# Altium PCB DC-DC Converter.PcbDoc (part 1 of 3)
Units mil, origin at the board's own origin, x right, y up, seen from the top; angles counter-clockwise.
Board outline 6692.91 x 3543.31 mil, 4 copper layers (Top Layer, GND, Power, Bottom Layer), stack 23.756 mil thick; 100 components, 76 nets, 345 pads, 803 vias.
Unrouted connection lines stored in the file: 1.
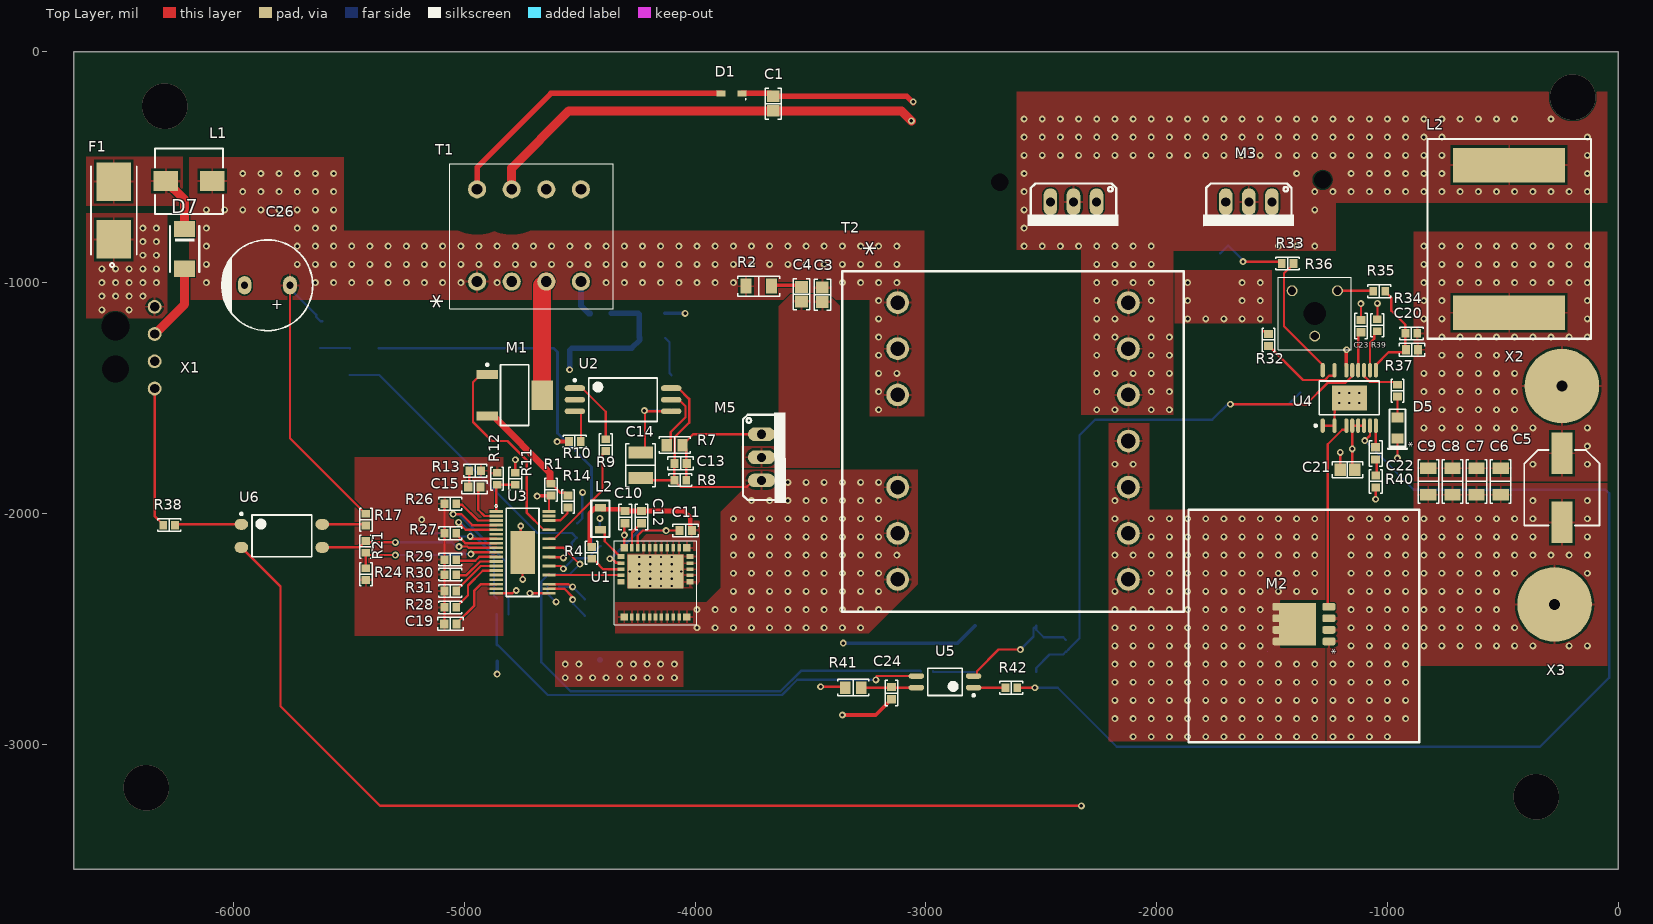
[diagram p0: Top Layer view]
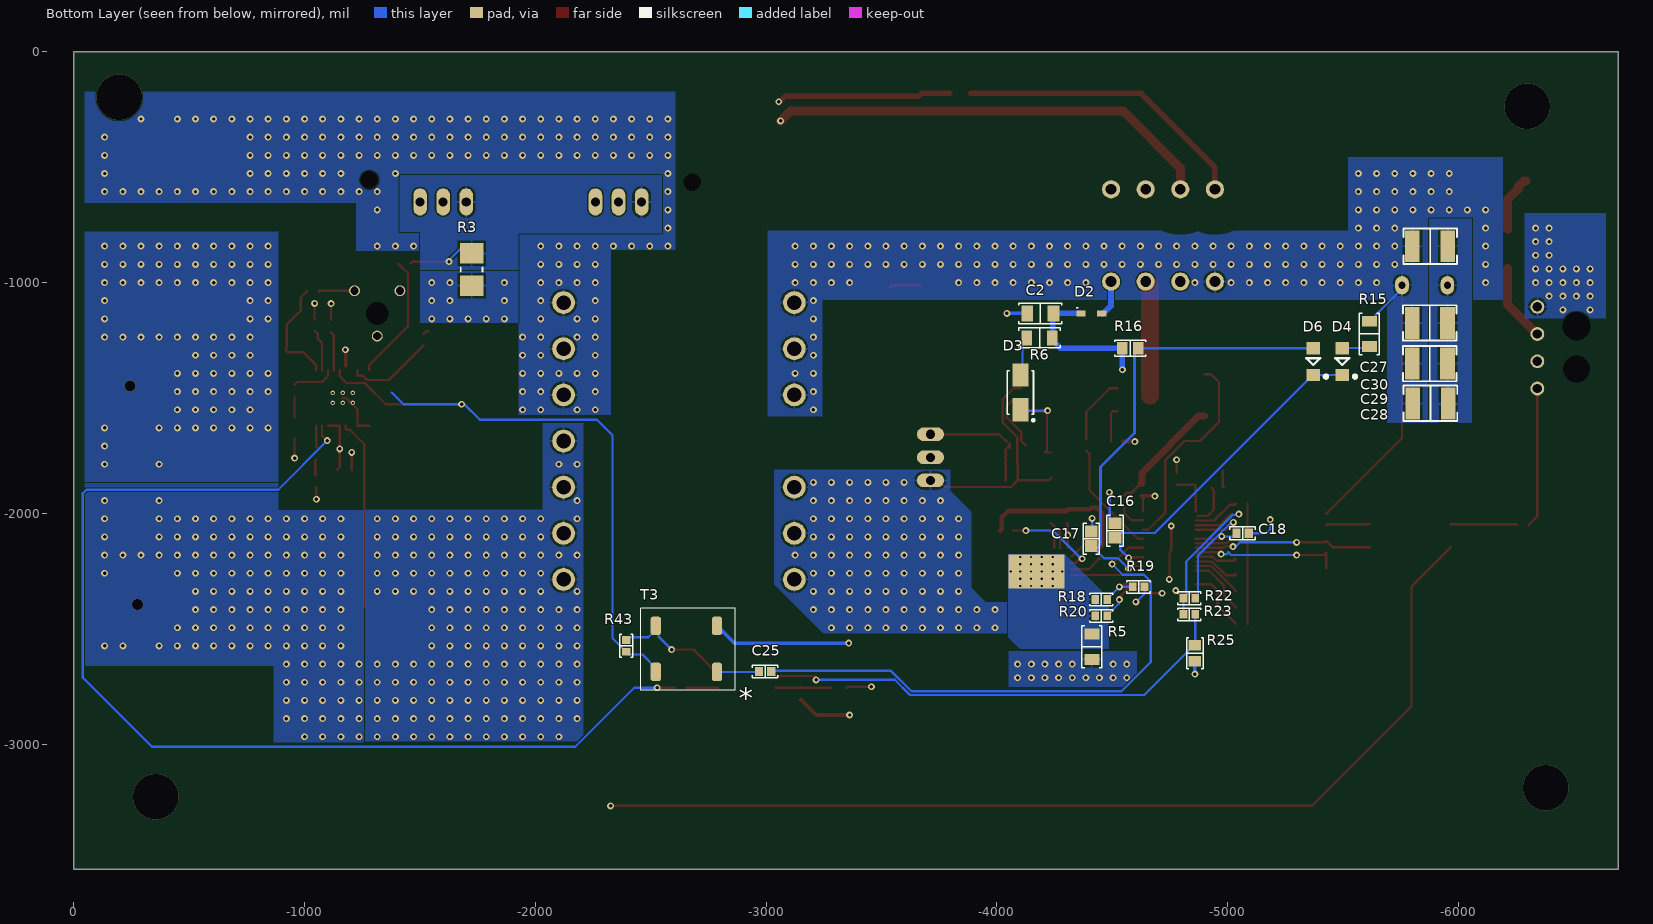
[diagram p1: Bottom Layer view, seen from below]
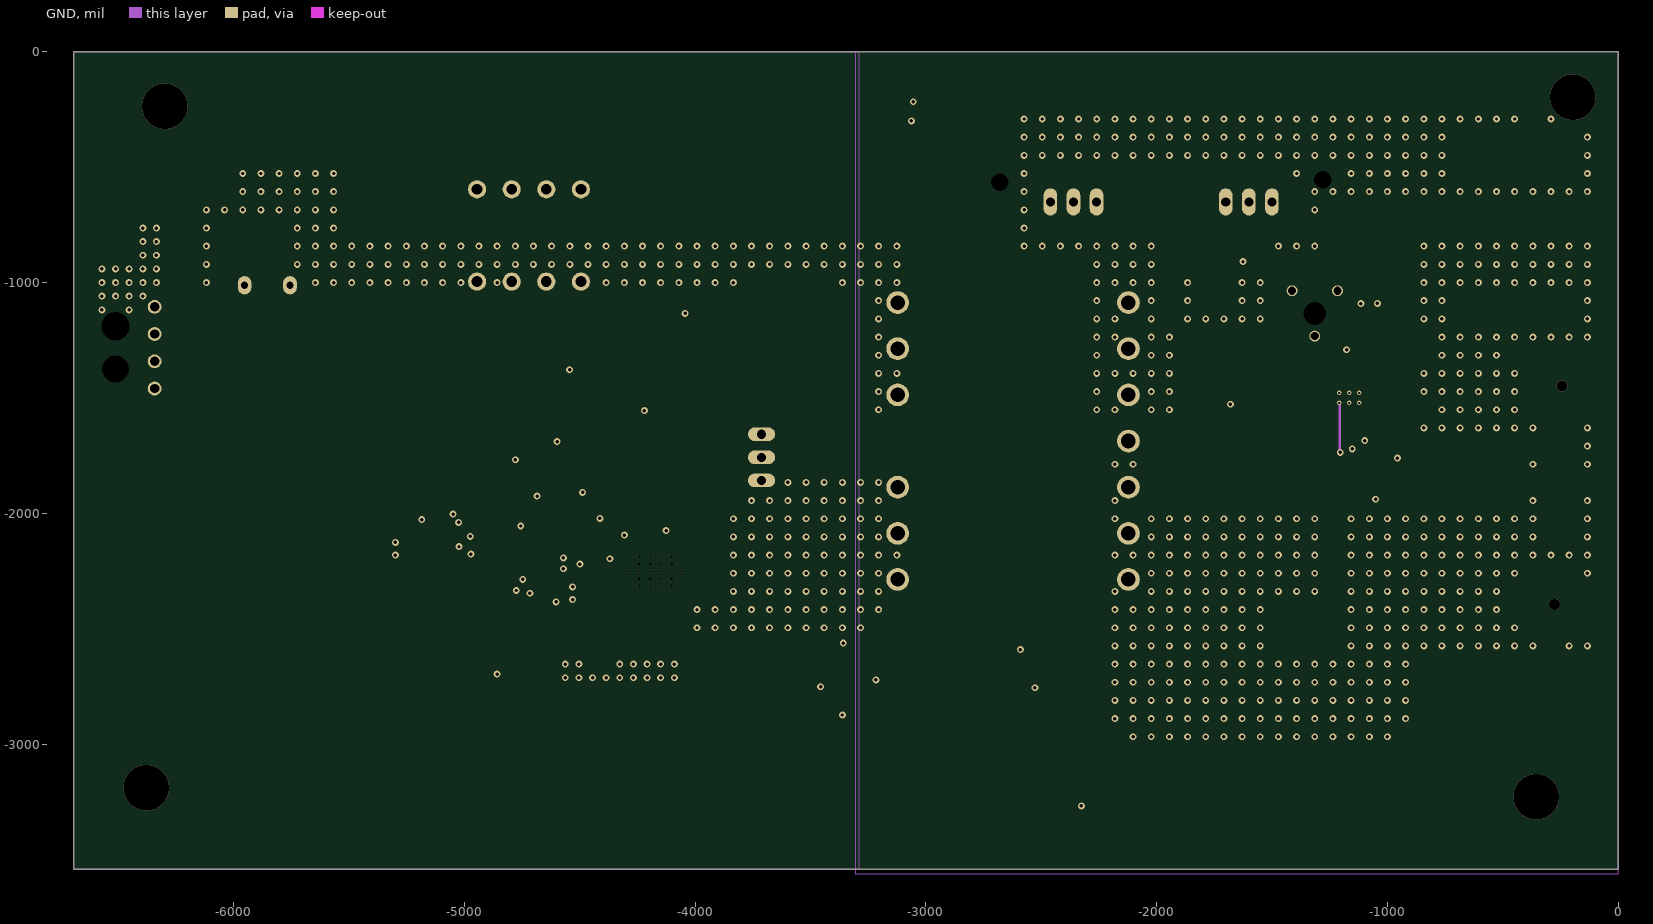
[diagram p2: GND]
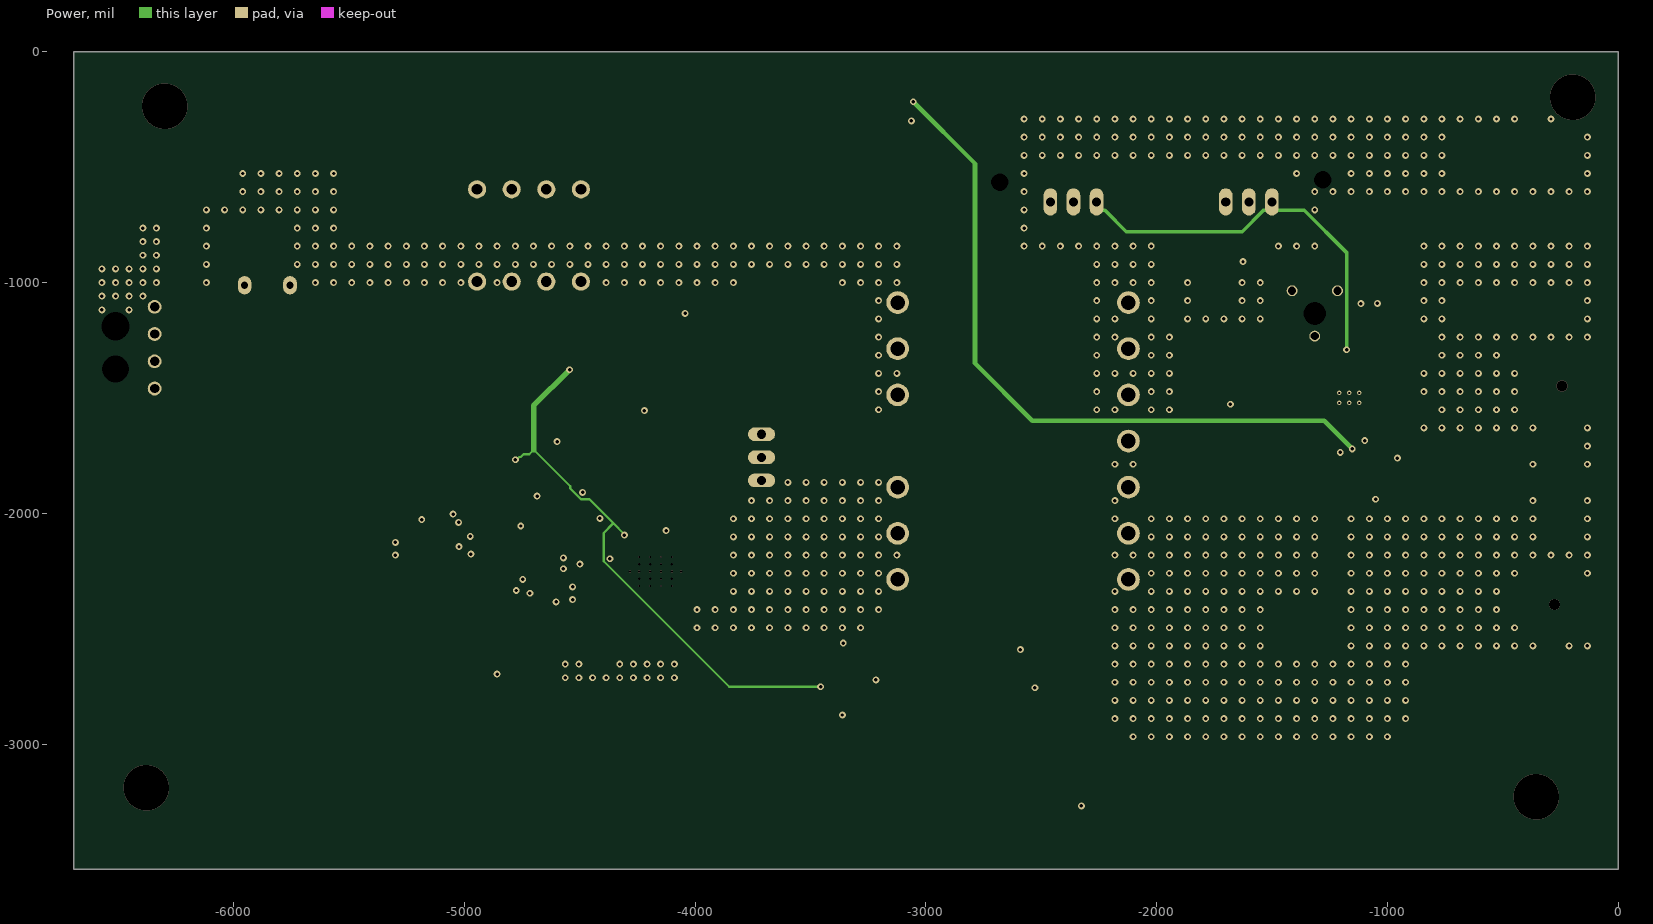
[diagram p3: Power]

## Layer stack, top to bottom
Top Solder: solder mask 0.4, Solder Resist, Dk 3.5
Top Layer: signal copper 1.4
Dielectric 2: prepreg 2.8, PP-006, Dk 4.1
GND: signal copper 1.3779
Dielectric 1: dielectric 12.6, FR-4, Dk 4.8
Power: signal copper 1.3779
Dielectric 3: prepreg 2.8, PP-006, Dk 4.1
Bottom Layer: signal copper 1.4
Bottom Solder: solder mask 0.4, Solder Resist, Dk 3.5

## Board outline
-6692.91,-3543.31 0,-3543.31 0,0 -6692.91,0

## Design rules (kind name [scope] priority, off if disabled: settings)
Clearance Clearance_1 [InNetClass('HV') vs InNetClass('LV')] p1: gap=157.48 ignorepadtopadclearanceinfootprint=FALSE
Clearance [InNetClass('All Nets')] p2: gap=6 ignorepadtopadclearanceinfootprint=FALSE
FabricationTestPointUsage TestPointUsage [All] p1: valid=0 allowmultiple=FALSE
FabricationTestpoint Testpoint [All] p1: side=3 testpointundercomponent=TRUE minsize=40 maxsize=100 preferedsize=60 minholesize=20 maxholesize=40 preferedholesize=32 testpointgrid=1 allowsidetop=TRUE allowsidebottom=TRUE usegrid=TRUE gridtolerance=0.01
Height [All] p1: minheight=0 maxheight=1968.5 prefheight=500
HoleSize [All] p1: absolutevalues=TRUE maxlimit=247 minlimit=10 maxpercent=80.000 minpercent=20.000
PasteMaskExpansion PasteMaskExpansion_1 [InComponent('P1')] p1: expansion=-150
PasteMaskExpansion [All] p2: expansion=0
PlaneClearance [All] p1: clearance=10
PlaneConnect [All] p1: planeconnectstyle=Relief reliefexpansion=15 reliefentries=4 reliefconductorwidth=10 reliefairgap=10
PolygonConnect PolygonConnect_4 [All vs IsNamedPolygon('HV+_L04_P106') Or  IsNamedPolygon('HVGND_L01_P104') Or  IsNamedPolygon('HVGND_L04_P102') Or  IsNamedPolygon('Top Layer-Pri_Drain_SWP') Or  IsNamedPolygon('LVGND_L01_P096') Or  IsNamedPolygon('LVGND_L04_P094') Or  IsNamedPolygon('CCH_DRAIN_CSW_L04_P092') Or  IsNamedPolygon('FWD_DRAIN_FSW_L04_P090') Or  IsNamedPolygon('+14V_OUT_L04_P088') Or  IsNamedPolygon('LVGND_L04_P086') Or  IsNamedPolygon('HV_IN_L04_P084') Or  IsNamedPolygon('HV_IN_L01_P082') Or  IsNamedPolygon('LVGND_L04_P080') Or  IsNamedPolygon('FWD_DRAIN_FSW_L01_P078') Or  IsNamedPolygon('LVGND_L01_P076') Or  IsNamedPolygon('AGND_L01_P074') Or  IsNamedPolygon('CCH_I_SENSE_L04_P072') Or  IsNamedPolygon('CCH_DRAIN_CSW_L01_P070') Or  IsNamedPolygon('LVGND_L01_P068') Or  IsNamedPolygon('+14V_OUT_L01_P066') Or  IsNamedPolygon('HV_IN_L04_P064') Or  IsNamedPolygon('HVGND_L04_P062') Or  IsNamedPolygon('HV+_L01_P060') Or  IsNamedPolygon('VIN_F_L01_P058') Or  IsNamedPolygon('Bottom Layer-Pri_Current_Sense') Or  IsNamedPolygon('Top Layer-Pri_Current_Sense') Or  IsNamedPolygon('Top Layer-Pri_Drain_SWP') Or  IsNamedPolygon('Top Layer-Clp_Drain') Or  IsNamedPolygon('LVGND') Or  IsNamedPolygon('HVGND')] p1: thpad.connectstyle=Relief thpad.reliefconductorwidth=10 thpad.reliefentries=4 thpad.polygonreliefangle="90 Angle" thpad.airgapwidth=10 smdpad.connectstyle=Relief smdpad.reliefconductorwidth=10 smdpad.reliefentries=4 smdpad.polygonreliefangle="90 Angle" smdpad.airgapwidth=10 via.connectstyle=Direct via.reliefconductorwidth=10 via.reliefentries=4 via.polygonreliefangle="90 Angle" via.airgapwidth=10
PolygonConnect PolygonConnect_3 [All vs IsNamedPolygon('HV+_L04_P106') Or  IsNamedPolygon('HVGND_L01_P104') Or  IsNamedPolygon('HVGND_L04_P102') Or  IsNamedPolygon('Top Layer-Pri_Drain_SWP') Or  IsNamedPolygon('LVGND_L01_P096') Or  IsNamedPolygon('LVGND_L04_P094') Or  IsNamedPolygon('CCH_DRAIN_CSW_L04_P092') Or  IsNamedPolygon('FWD_DRAIN_FSW_L04_P090') Or  IsNamedPolygon('+14V_OUT_L04_P088') Or  IsNamedPolygon('LVGND_L04_P086') Or  IsNamedPolygon('HV_IN_L04_P084') Or  IsNamedPolygon('HV_IN_L01_P082') Or  IsNamedPolygon('LVGND_L04_P080') Or  IsNamedPolygon('FWD_DRAIN_FSW_L01_P078') Or  IsNamedPolygon('LVGND_L01_P076') Or  IsNamedPolygon('AGND_L01_P074') Or  IsNamedPolygon('CCH_I_SENSE_L04_P072') Or  IsNamedPolygon('CCH_DRAIN_CSW_L01_P070') Or  IsNamedPolygon('LVGND_L01_P068') Or  IsNamedPolygon('+14V_OUT_L01_P066') Or  IsNamedPolygon('HV_IN_L04_P064') Or  IsNamedPolygon('HVGND_L04_P062') Or  IsNamedPolygon('HV+_L01_P060') Or  IsNamedPolygon('VIN_F_L01_P058') Or  IsNamedPolygon('Bottom Layer-Pri_Current_Sense') Or  IsNamedPolygon('Top Layer-Pri_Current_Sense') Or  IsNamedPolygon('Top Layer-Pri_Drain_SWP') Or  IsNamedPolygon('Top Layer-Clp_Drain') Or  IsNamedPolygon('LVGND') Or  IsNamedPolygon('HVGND')] p2: thpad.connectstyle=Relief thpad.reliefconductorwidth=10 thpad.reliefentries=4 thpad.polygonreliefangle="90 Angle" thpad.airgapwidth=10 smdpad.connectstyle=Relief smdpad.reliefconductorwidth=10 smdpad.reliefentries=4 smdpad.polygonreliefangle="90 Angle" smdpad.airgapwidth=10 via.connectstyle=Direct via.reliefconductorwidth=10 via.reliefentries=4 via.polygonreliefangle="90 Angle" via.airgapwidth=10
PolygonConnect PolygonConnect_2 [All vs IsNamedPolygon('LVGND_L01_P076')] p3: thpad.connectstyle=Relief thpad.reliefconductorwidth=10 thpad.reliefentries=4 thpad.polygonreliefangle="90 Angle" thpad.airgapwidth=10 smdpad.connectstyle=Direct smdpad.reliefconductorwidth=10 smdpad.reliefentries=4 smdpad.polygonreliefangle="90 Angle" smdpad.airgapwidth=10 via.connectstyle=Relief via.reliefconductorwidth=10 via.reliefentries=4 via.polygonreliefangle="90 Angle" via.airgapwidth=10
PolygonConnect PolygonConnect_1 [All vs IsNamedPolygon('FWD_DRAIN_FSW_L01_P078')] p4: thpad.connectstyle=Relief thpad.reliefconductorwidth=10 thpad.reliefentries=4 thpad.polygonreliefangle="90 Angle" thpad.airgapwidth=10 smdpad.connectstyle=Direct smdpad.reliefconductorwidth=10 smdpad.reliefentries=4 smdpad.polygonreliefangle="90 Angle" smdpad.airgapwidth=10 via.connectstyle=Relief via.reliefconductorwidth=10 via.reliefentries=4 via.polygonreliefangle="90 Angle" via.airgapwidth=10
PolygonConnect PolygonConnect_11 [All vs IsNamedPolygon('Top Layer-Pri_Current_Sense')] p5: connectstyle=Relief reliefconductorwidth=10 reliefentries=4 polygonreliefangle="90 Angle" airgapwidth=10
PolygonConnect [All] p6: connectstyle=Relief reliefconductorwidth=10 reliefentries=4 polygonreliefangle="90 Angle" airgapwidth=10
RoomDefinition "U_Enable SSR" [InComponentClass('U_Enable SSR')] p1: confinementstyle=ConfineIn formatcopy=TRUE lockcomponents=FALSE outline -5547.24,-1965.56 -6464.57,-1965.56 -6464.57,-2308.08 -5547.24,-2308.08
RoutingVias [All] p1: holewidth=15 width=30 viastyle="Through Hole" minholewidth=10 minwidth=20 maxholewidth=15 maxwidth=50
SilkToSilkClearance [All] p1: silktosilkclearance=3
SilkToSolderMaskClearance SilkscreenOverComponentPads [IsPad] p1: minsilkscreentomaskgap=5 clearancetoexposedcopper=TRUE
SolderMaskExpansion [All] p1: expansion=5
UnRoutedNet [All] p1: checkbadconnections=TRUE
Width [All] p1: maxlimit=150 minlimit=5 preferedwidth=10
20 further rules are at their usual default settings.

## Classes and differential pairs
net class LV: 8311_COMP 8311_COMP_MID 8311_CSN 8311_CSP 8311_FB 8311_FB_R 8311_SS 8311_TIMER +12V_HC_LV +14V_OUT Aux_Sec_LV__Dot Cch_Drain_CSW Cch_Drive Cch_I_Sense CPC_CTRL+ Fwd_Drain_FSW Fwd_Drive LVGND NetR36_3 OPTO_OUT P\G\O\O\D\ P\G\O\O\D_R SSR_ENABLE SYNC_OUT
net class HV: +12V_HC_HV AGND Aux_Pri_Dot Aux_Sec_HV_Dot BBSW Cch_Gate Clp_Drain Clp_Gate Comp FB HCOMP HCOMP_C HFB HISENSE HV+ HV_IN HV_IN_R HVGND INTVCC ISENSEP IVSEC NetU3_6 OC OPTO_C Opto_In OVLO PP5V0_L Pri_Current_Sense Pri_Drain_SWP Pri_Gate Q2_D Q2_G RDRV RT SNUB_RC SS1 SS2 Sync_HV_Dot SYNC_IN TAO TAS TBLNK TOS UVLO_Vsec VIN VIN_F VIN_R VNEG W346_A W346_C W346_Charge W346_OUT W346_VCC
component class "U_Enable SSR": R38 U6
component class U_OptoIsolator: C24 R41 R42 U5
component class "U_System Input": C26 C27 C28 C29 C30 D7 F1 L1
component class "U_Sync Transformer": C25 R43 T3
component class U_LT8311-Main: C20 C21 C22 C23 D5 R32 R33 R34 R35 R36 R37 R39 R40 U4
component class U_LT3752-Main: C15 C16 C17 C18 C19 D4 D6 R11 R12 R13 R14 R15 R16 R17 R18 R19 R20 R21 R22 R23 R24 R25 R26 R27 R28 R29 R30 R31 U3
component class "U_Gate Driver": C13 C14 D3 R6 R7 R8 R9 R10 U2
component class "U_Forward Active Supply": C3 C4 C5 C6 C7 C8 C9 C10 C11 C12 L2 M2 M3 M5 R2 R3 R4 R5 T2 U1
component class U_Flyback: C1 C2 D1 D2 M1 R1 T1
component class "DC-DC Converter": X1 X2 X3

## Components (designator, comment, footprint, x,y, rotation, side; value= is the part's Value field where it differs from the comment)
C1 "Capacitor MLCC 4.7uf 25V CAP 0805/2012" "CAP 0805/2012" -3661.42,-224.41 r90 top value=4.7uf
C2 "Capacitor MLCC 22uf 25V CAP 1206/3216" "CAP 1206/3216 - 1.8MM" -4188.98,-1133.86 r180 bottom value=22uf
C3 "Capacitor MLCC 11pf 250V CAP 0805/2012" "CAP 0805/2012" -3448.82,-1053.31 r90 top value=11pf
C4 "Capacitor MLCC 68pf 200V CAP 0805/2012" "CAP 0805/2012" -3539.37,-1051.18 r90 top value=68pf
C5 "Capacitor Aluminum Hybrid Radial 330uf 25V CAP EL 8.3" "CAP ALUM 8.3MM" -244.09,-1889.76 r270 top value=330uf
C6 "Capacitor MLCC 10uf 25V CAP 1206/3216" "CAP 1206/3216 - 1.8MM" -509.34,-1862.2 r90 top value=10uf
C7 "Capacitor MLCC 10uf 25V CAP 1206/3216" "CAP 1206/3216 - 1.8MM" -613.84,-1862.2 r90 top value=10uf
C8 "Capacitor MLCC 10uf 25V CAP 1206/3216" "CAP 1206/3216 - 1.8MM" -718.34,-1862.2 r90 top value=10uf
C9 "Capacitor MLCC 10uf 25V CAP 1206/3216" "CAP 1206/3216 - 1.8MM" -822.83,-1862.2 r90 top value=10uf
C10 "Capacitor MLCC 10uf 16V CAP 0603/1608" "CAP 0603/1608" -4303.32,-2016.73 r270 top value=10uf
C11 "Capacitor MLCC 0.22uf 50V CAP 0603/1608" "CAP 0603/1608" -4041.08,-2074.8 r180 top value=0.22uf
C12 "Capacitor MLCC 2.2uf 25V CAP 0603/1608" "CAP 0603/1608" -4232.28,-2016.73 r90 top value=2.2uf
C13 "Capacitor MLCC 470pf 50V CAP 0603/1608" "CAP 0603/1608" -4062.99,-1783.46 r0 top value=470pf
C14 "Capacitor MLCC 50.047uf 630V CAP 1210/3225" "CAP 1210/3225 - 1.6MM" -4236.22,-1791.34 r90 top value=0.047uf
C15 "Capacitor MLCC 0.22uf 25V CAP 0603/1608" "CAP 0603/1608" -4956.86,-1886.76 r180 top value=0.22uf
C16 "Capacitor MLCC 22uf 25V CAP 0805/2012" "CAP 0805/2012" -4511.81,-2074.8 r270 bottom value=22uf
C17 "Capacitor MLCC 4.7uf 25V CAP 0805/2012" "CAP 0805/2012" -4409.45,-2110.24 r270 bottom value=4.7uf
C18 "Capacitor MLCC 0.47uf 25V CAP 0603/1608" "CAP 0603/1608" -5064.96,-2086.61 r0 bottom value=0.47uf
C19 "Capacitor MLCC 0.10uf 25V CAP 0603/1608" "CAP 0603/1608" -5061.02,-2478.85 r0 top value=0.10uf
C20 "Capacitor MLCC 68pf 25V CAP 0603/1608" "CAP 0603/1608" -893.7,-1291.34 r0 top value=68pf
C21 "Capacitor MLCC 4.7uf 25V CAP 0805/2012" "CAP 0805/2012" -1173.23,-1811.02 r0 top value=4.7uf
C22 "Capacitor MLCC 0.022uf 16V CAP 0603/1608" "CAP 0603/1608" -1051.01,-1739.99 r90 top value=0.022uf
C23 "Capacitor MLCC 0.033uf 16V CAP 0603/1608" "CAP 0603/1608" -1114.99,-1188.54 r90 top value=0.033uf
C24 "Capacitor MLCC 1.0uf 25V CAP 0603/1608" "CAP 0603/1608" -3149.61,-2779.53 r90 top value=1.0uf
C25 "Capacitor MLCC 220pf 25V CAP 0603/1608" "CAP 0603/1608" -2996.06,-2685.04 r0 bottom value=220pf
C26 "Capacitor Electrolytic 10uf 500V CAP D10_31.5" "CAP AL TH D10 L5 H30" -5854.33,-1011.81 r180 top value=10uf
C27 "Capacitor MLCC 0.3uf 630V CAP 1812/4532" "CAP 1812/4532 2.8MM" -5877.95,-842.52 r0 bottom value=0.3uf
C28 "Capacitor MLCC 0.3uf 630V CAP 1812/4532" "CAP 1812/4532 2.8MM" -5879.13,-1523.62 r0 bottom value=0.3uf
C29 "Capacitor MLCC 0.3uf 630V CAP 1812/4532" "CAP 1812/4532 2.8MM" -5876.38,-1351.18 r0 bottom value=0.3uf
C30 "Capacitor MLCC 0.3uf 630V CAP 1812/4532" "CAP 1812/4532 2.8MM" -5876.38,-1174.8 r0 bottom value=0.3uf
D1 "BAT46WJ" SOD323F -3842.52,-180.31 r180 top value=Vf=0.3@20mA
D2 "BAT46WJ" SOD323F -4409.45,-1133.86 r180 bottom value=Vf=0.3@20mA
D3 "" SMA -4102.36,-1476.38 r270 bottom value=1A
D4 "" SOD123F -5497.17,-1342.52 r270 bottom value=Vf-1.25V,Vr-100V
D5 "" 0805_LED -956.69,-1629.92 r270 top value=Red
D6 "" SOD123F -5371.18,-1342.52 r270 bottom value=Vf-1.25V,Vr-100V
D7 "SD560BTR" "DO214AA_ SD560BTR" -6212.6,-854.33 r270 top value="1.2V @ 5A"
F1 "Fuse" 04853,15DR -6519.29,-687.8 r90 top value=3.15A
L1 "" 744311470 -6193.31,-560.63 r0 top value=4.7uH
L2 "" IHLP-6767GZ -472.44,-811.02 r270 top value=1.5uH
L2 "" 74404020100 -4410.43,-2023.62 r0 top value=10uH
M1 "AUX Transistor" PG-SOT223 -4782.37,-1488.19 r0 top value=N_Channel
M2 "Forward Mosfet" "SOP Advance" -1362.2,-2480.32 r90 top value=N_Channel
M3 "Catch Mosfet x2" TO-220ABx2 -2360.8,-764.95 r180 top value="N_Channel x2"
M5 "Clamp Transistor" IPP60R190P6 -3712.6,-1757.48 r270 top locked value=N_Channel
R1 "RES 0.0025 OHM 1% 1/4W 0603" "RES 0603/1608" -4625,-1897.35 r90 top value=0.0025
R2 "RES 560 OHM 1% 1W 1206" "RES 1206/3216" -3724.41,-1015.75 r180 top value=560
R3 "RES 0.001 OHM 1% 1.5W 2010" "RES 2010/5025" -1724.41,-943.5 r90 bottom value=1mOhm
R4 "Resistor 39k 0603 1/10W 1%" "RES 0603/1608" -4448.82,-2171.51 r270 top value=39k
R5 "RES 0.008 OHM 1% 1W 1206" "RES 1206/3216" -4411.58,-2578.74 r90 bottom value=8mOhm
R6 "RES 1.3 OHM 1% 1/4W 1206" "RES 1206/3216" -4185.04,-1240.16 r180 bottom value=1.3
R7 "Resistor 4.7 0805 1/4W 1%" "RES 0805/2012" -4089.4,-1704.56 r0 top value=4.7
R8 "Resistor 10k 0603 1/10W 1%" "RES 0603/1608" -4064.55,-1856.3 r0 top value=10k
R9 "Resistor 220 0603 1/10W 5%" "RES 0603/1608" -4387.8,-1704.72 r90 top value=220
R10 "Resistor 150 0603 1/10W 5%" "RES 0603/1608" -4521.38,-1688.98 r0 top value=150
R11 "Resistor 10k 0603 1/10W 1%" "RES 0603/1608" -4779.53,-1850.39 r270 top value=10k
R12 "Resistor 806 0603 1/10W 1%" "RES 0603/1608" -4858.27,-1850.39 r270 top value=806
R13 "Resistor 2.8k 0603 1/10W 1%" "RES 0603/1608" -4953.74,-1815.73 r0 top value=2.8k
R14 "Resistor 499 0603 1/10W 1%" "RES 0603/1608" -4551.18,-1948.82 r90 top value=499
R15 "Resistor 715k 1206 1/4W 1%" "RES 1206/3216" -5614.96,-1222.83 r90 bottom value=715k
R16 "Resistor 10 0805 1/4W 10%" "RES 0805/2012" -4578.74,-1284.45 r180 bottom value=10
R17 "Resistor 1.0M 0603 1/10W 1%" "RES 0603/1608" -5427.17,-2027.48 r270 top value=1.0M
R18 "Resistor 20k 0603 1/10W 1%" "RES 0603/1608" -4452.76,-2373.68 r0 bottom value=20k
R19 "Resistor 20k 0603 1/10W 1%" "RES 0603/1608" -4614.17,-2318.9 r0 bottom value=20k
R20 "Resistor 1.5k 0603 1/10W 1%" "RES 0603/1608" -4452.76,-2444.71 r0 bottom value=1.5k
R21 "Resistor 36.5k 0603 1/10W 1%" "RES 0603/1608" -5427.17,-2145.59 r90 top value=36.5k
R22 "Resistor 100k 0603 1/10W 1%" "RES 0603/1608" -4834.65,-2368.61 r0 bottom value=100k
R23 "Resistor 100k 0603 1/10W 1%" "RES 0603/1608" -4834.65,-2437.99 r180 bottom value=100k
R24 "Resistor 3.0k 0603 1/10W 1%" "RES 0603/1608" -5427.17,-2263.7 r90 top value=3.0k
R25 "Resistor 1.0k 0805 1/4W 5%" "RES 0805/2012" -4858.27,-2606.3 r90 bottom value=1.0k
R26 "Resistor 24.9k 0603 1/10W 1%" "RES 0603/1608" -5061.02,-1958.33 r0 top value=24.9k
R27 "Resistor 68k 0603 1/10W 1%" "RES 0603/1608" -5061.02,-2086.61 r0 top value=68k
R28 "Resistor 51k 0603 1/10W 1%" "RES 0603/1608" -5061.02,-2407.82 r0 top value=51k
R29 "Resistor 76.8k 0603 1/10 1%" "RES 0603/1608" -5061.02,-2200.79 r0 top value=76.8k
R30 "Resistor 15k 0603 1/10W 1%" "RES 0603/1608" -5061.02,-2265.75 r0 top value=15k
R31 "Resistor 7.5k 0603 1/10W 1%" "RES 0603/1608" -5061.02,-2336.78 r0 top value=7.5k
R32 "Resistor 360 0603 1/10W 1%" "RES 0603/1608" -1515.75,-1249.01 r90 top value=360
R33 "Resistor 360 0603 1/10W 1%" "RES 0603/1608" -1433.07,-917.32 r180 top value=360
R34 "Resistor 10k 0603 1/10W 1%" "RES 0603/1608" -895.92,-1220.3 r0 top value=10k
R35 "Resistor 820 0603 1/10W 1%" "RES 0603/1608" -1035.43,-1037.4 r0 top value=820
R36 "TRIMMER 470 OHM LINEAR" PT6WV -1314.96,-1133.86 r180 top value=470
R37 "Resistor 360 0603 1/10W 1%" "RES 0603/1608" -956.69,-1468.5 r90 top value=360
R38 "Resistor 10k 0603 1/10W 1%" "RES 0603/1608" -6279.53,-2051.18 r180 top value=10k
R39 "Resistor 47k 0603 1/10W 1%" "RES 0603/1608" -1043.96,-1185.04 r270 top value=47k
R40 "Resistor 560 0603 1/10W 1%" "RES 0603/1608" -1051.18,-1862.2 r90 top value=560
R41 "Resistor 51 0805 1/4W 1%" "RES 0805/2012" -3314.96,-2755.48 r180 top value=51
R42 "Resistor 1.5k 0603 1/10W 1%" "RES 0603/1608" -2629.92,-2755.91 r180 top value=1.5k
R43 "Resistor 560 0603 1/10W 1%" "RES 0603/1608" -2393.7,-2574.8 r270 bottom value=560
T1 "Aux Transformer" 750817020 -4945.28,-996.06 r90 top value="4mH - 9.33:1:1.17"
T2 "" B66359 -2622.37,-1686.76 r270 top value="200uH x:x"
T3 "Sync Transformer" PE-68386NLT -2787.4,-2687.54 r0 bottom value="785uH - 1:1"
U1 "" RWH0032A -4171.89,-2299.37 r90 top value=N_Channel
U2 "" "SOIC-6 (8-mm Clearance)" -4312.72,-1507.87 r0 top value="Gate Driver"
U3 "" TSSOP-38 -4748.03,-2169.29 r0 top value=Forward
U4 "" FE20(16) -1165.35,-1500 r90 top value="Secondary Side Controller"
U5 "PC817B" SOIC-4 -2917.49,-2730.48 r180 top value="90mA, 40VCe"
U6 "" CPC1393GR -5791.34,-2097.77 r0 top value=Null
X1 "43650-0402" Molex_43650_0402 -6342.52,-1105.12 r180 top value=CONN
X2 "7466113" 7466113 -244.09,-1448.57 r0 top value=CONN
X3 "7466113" 7466113 -275.59,-2394.69 r0 top value=CONN

## Footprints (in the part's own frame and the unit in brackets; to place one, negate y for a bottom-side part, rotate by r counter-clockwise, add the part's x,y. Pads: shape width x height; smd on the part's side, far side on the other; paste and mask are expansions set on the pad)
0805_LED [mm]
  rect 1.1x1.3 smd: 1(-1.15,0) 2(1.15,0)
  silkscreen extent -2.06,-1.02 2.29,1.02, body extent -1.05,-0.67 1.05,0.68, height 0.9
04853,15DR [mm]
  rect 4.24x3.81 smd: 1(-3.19,0) 2(3.19,0)
  silkscreen extent -6.22,-2.51 4.86,2.51, body extent -3.05,-1.44 3.05,1.5, height 2.7
7466113 [mm]
  round 8.2 smd: 1(0,0)
  body extent -3.5,-3.49 3.5,3.5, height 8.01
744311470 [mm]
  rect 2.7x2.2 smd: 1(-2.55,0) 2(2.55,0)
  silkscreen extent -3.75,-3.6 3.75,3.6, body extent -3.5,-3.45 3.5,3.45, height 4
750817020 [mm]
  round 2 hole 1.19: 1(0,0) 2(0,-3.81) 3(0,-7.62) 4(0,-11.43) 5(10.16,-11.43) 6(10.16,-7.62) 7(10.16,-3.81) 8(10.16,0)
  silkscreen extent -3,-15 13,3, body extent -2.87,-13.09 12.88,2.1, height 18.5
74404020100 [mm]
  rect 1.2x0.85 smd mask+0.05: 1(0,1.2) 2(0,-1.2)
  silkscreen extent -1,-2 1,2, body extent -0.8,-1 0.82,1, height 1.01
B66359 [mm]
  round 2.5 hole 1.6: 1(-15.24,-12.7) 2(-10.16,-12.7) 3(-5.08,-12.7) 4(5.08,-12.7) 5(10.16,-12.7) 6(15.24,-12.7) 7(15.24,12.7) 8(10.16,12.7) 9(5.08,12.7) 10(0,12.7) 11(-5.08,12.7) 12(-10.16,12.7) 13(-15.24,12.7)
  silkscreen extent -18.7,-18.8 18.8,18.8, body extent -17.6,-17.7 17.6,17.7, height 25
"CAP 0603/1608" [mm] "Chip Capacitor, 2-Leads, Body 1.60x0.80mm, IPC Medium Density"
  rect 0.9x1 smd: 1(-0.675,0) 2(0.675,0)
  silkscreen extent -1.4,-0.7 1.4,0.7, body extent -0.8,-0.41 0.8,0.41, height 0.82
"CAP 0805/2012" [mm] "Chip Capacitor, 2-Leads, Body 2.00x1.20mm, IPC Medium Density"
  rect 1.3x1.4 smd: 1(-0.8,0) 2(0.8,0)
  silkscreen extent -1.7,-0.9 1.7,0.9, body extent -1,-0.64 1,0.64, height 1.26
"CAP 1206/3216 - 1.8MM" [mm] "Chip Capacitor, 2-Leads, Body 3.25x1.60mm, IPC Medium Density"
  rect 1.3x1.8 smd: 1(-1.45,0) 2(1.45,0)
  silkscreen extent -2.37,-1.12 2.37,1.12, body extent -1.6,-0.8 1.6,0.8, height 1.8
"CAP 1210/3225 - 1.6MM" [mm] "Chip Capacitor, 2-Leads, Body 3.20x2.50mm, IPC Medium Density"
  rect 1.3x2.7 smd: 1(-1.4,0) 2(1.4,0)
  silkscreen extent -2.37,-1.63 2.37,1.63, body extent -1.6,-1.25 1.6,1.25, height 1.6
"CAP 1812/4532 2.8MM" [mm] "Chip Capacitor, 2-Leads, Body 4.50x3.20mm, IPC Medium Density"
  rect 1.6x3.5 smd: 1(-1.95,0) 2(1.95,0)
  silkscreen extent -2.95,-1.95 2.95,1.95, body extent -2.25,-1.6 2.25,1.6, height 2.8
"CAP AL TH D10 L5 H30" [mm] "10MM Diameter, 5MM Lead Spacing Aluminium Capacitor"
  oval 1.5x2 hole 0.8: 1(-2.5,0) 2(2.5,0)
  silkscreen extent -5,-5 5,5, body extent -5,-4.99 5,4.99, height 30.2
"CAP ALUM 8.3MM" [mm] "Aluminum Electrolytic Capacitor, Body 8.30x8.30x10.50mm, IPC Low Density"
  rect 4.55x2.3 smd: 1(-3.8,0) 2(3.8,0)
  silkscreen extent -4.15,-4.15 4.15,4.15, body extent -4.95,-4.15 4.95,4.15, height 10.5
CPC1393GR [mm] "CPC1393GR, 4-Leads, Body 4.57x6.35mm, Pitch 2.54mm, IPC Medium Density"
  oval 1.5x1.2 smd: 1(-4.45,1.27) 2(-4.45,-1.27) 3(4.45,-1.27) 4(4.45,1.27)
  silkscreen extent -4.57,-2.3 3.3,2.54, body extent -4.76,-2.3 4.76,2.3, height 3.3
"DO214AA_ SD560BTR" [mil]
  rect 70x90 smd: 1(85.71,0) 2(-85.71,0)
  silkscreen extent -98,-63 98,63, body extent -98,-53 98,53, height 91
FE20(16) [mm] "TSSOP with Ground Pad and Missing Pins"
  oval 1.6x0.45 smd: 1(-3.05,2.925) 3(-3.05,1.625) 5(-3.05,0.325) 6(-3.05,-0.325) 7(-3.05,-0.975) 8(-3.05,-1.625) 9(-3.05,-2.275) 10(-3.05,-2.925) 11(3.05,-2.925) 12(3.05,-2.275) 13(3.05,-1.625) 14(3.05,-0.975) 15(3.05,-0.325) 16(3.05,0.325) 18(3.05,1.625) 20(3.05,2.925)
  rect 2.74x3.86 smd: 21(0,0)
  silkscreen extent -3.17,-3.3 1.85,3.82, body extent -3.22,-3.3 3.22,3.3, height 1.2
IHLP-6767GZ [mm]
  rect 3.825x12.32 smd: 1(-8.123,0) 2(8.123,0)
  silkscreen extent -11,-9 11,9, body extent -8.59,-8.71 8.59,8.46, height 6.9
IPP60R190P6 [mm] "IPP60R190P6"
  oval 1.5x3 hole 1: 1(-2.54,0) 2(0,0) 3(2.54,0)
  silkscreen extent -4.95,-2.03 5.05,2.71, body extent -15,-5.85 15,6.15, height 37.5
Molex_43650_0402 [mm]
  round 1.524 hole 1.02: 1(0,0) 2(0,3) 3(0,6) 4(0,9)
  round 0 hole 3: 5(4.32,6.85)
  round 0 hole 3.1: 5(4.32,2.15)
  body extent -1.15,-3.32 8.75,12.33, height 5.57
PE-68386NLT [mil]
  rrect50% 45x80 smd: 1(0,0) 3(0,-200) 4(265,-200) 6(265,0)
  silkscreen extent -79,-276 331,79, body extent 1,-231 266,34, height 98
PG-SOT223 [mm] "SOT223, 3-Leads, Body 6.50x7.00mm (avg), Pitch 4.60mm, IPC Low Density"
  rect 2.35x1 smd: 1(-3.025,2.3) 3(-3.025,-2.3)
  rect 2.35x3.25 smd: 2(3.025,0)
  silkscreen extent -3.15,-3.35 1.55,3.47, body extent -3.5,-3.35 3.5,3.35, height 1.8
PT6WV [mm]
  round 0 hole 2.5 unplated: 0(0,0)
  round 1.2 hole 0.9: 1(-2.5,-2.5) 2(2.5,-2.5) 3(0,2.5)
  silkscreen extent -4,-4 4,4, body extent -3.15,-3.15 3.15,3.15, height 4
"RES 0603/1608" [mm] "Chip Resistor, 2-Leads, Body 1.60x0.80mm, IPC Medium Density"
  rect 0.85x0.95 smd: 1(-0.65,0) 2(0.65,0)
  silkscreen extent -1.27,-0.7 1.27,0.7, body extent -0.8,-0.4 0.8,0.4, height 0.45
"RES 0805/2012" [mm] "Chip Resistor, 2-Leads, Body 2.00x1.25mm, IPC Medium Density"
  rect 1.15x1.35 smd: 1(-0.875,0) 2(0.875,0)
  silkscreen extent -1.7,-0.9 1.7,0.9, body extent -0.95,-0.62 1.05,0.63, height 0.6
"RES 1206/3216" [mm] "Chip Resistor, 2-Leads, Body 3.13x1.55mm, IPC Medium Density"
  rect 1.2x1.65 smd: 1(-1.4,0) 2(1.4,0)
  silkscreen extent -2.3,-1.1 2.3,1.1, body extent -1.57,-0.8 1.62,0.8, height 0.6
"RES 2010/5025" [mm] "Current Sense Resistor, 2-Leads, Body 5.05x2.55mm, IPC Medium Density"
  rect 2.25x2.6 smd: 1(-1.775,0) 2(1.775,0)
  silkscreen extent -0.25,-1.2 0.25,1.2, body extent -2.55,-1.3 2.55,1.3, height 0.65
RWH0032A [mm]
  rect 0.8x0.8 smd mask+0.1: 1(-3.8,3.45) 11(-3.8,-3.45) 17(3.8,-3.45) 27(3.8,3.45)
  rect 0.8x0.4 smd mask+0.1: 2(-3.8,2.6) 3(-3.8,1.95) 4(-3.8,1.3) 5(-3.8,0.65) 6(-3.8,0) 7(-3.8,-0.65) 8(-3.8,-1.3) 9(-3.8,-1.95) 10(-3.8,-2.6) 18(3.8,-2.6) 19(3.8,-1.95) 20(3.8,-1.3) 21(3.8,-0.65) 22(3.8,0) 23(3.8,0.65) 24(3.8,1.3) 25(3.8,1.95) 26(3.8,2.6)
  rect 0.6x0.8 smd mask+0.1: 12(0.05,-3.8) 16(2.85,-3.8) 28(2.85,3.8) 32(0.05,3.8)
  rect 0.4x0.8 smd mask+0.1: 13(0.8,-3.8) 14(1.45,-3.8) 15(2.1,-3.8) 29(2.1,3.8) 30(1.45,3.8) 31(0.8,3.8)
  round 0.2 hole 0.254 paste+0 mask+0: 33(-0.4,1.785) 33(-0.4,0.595) 33(-0.4,-0.595) 33(-0.4,-1.785) 33(0.4,1.785) 33(0.4,0.595) 33(0.4,-0.595) 33(0.4,-1.785) 33(1.2,1.785) 33(1.2,2.835) 33(1.2,-0.595) 33(1.2,0.595) 33(1.2,-2.835) 33(1.2,-1.785) 33(2,-1.785) 33(2,-0.595) 33(2,0.595) 33(2,1.785) 33(2.8,-1.785) 33(2.8,-0.595) 33(2.8,0.595) 33(2.8,1.785)
  rect 3.75x6.2 smd mask+0.1: 33(1.2,0)
  rect 3.75x6.2 smd far side mask+0.05: 33(1.2,0)
  silkscreen extent -4.65,-4.55 4.6,4.55, body extent -4,-4 4,4, height 1.35
SMA [mm] "Molded Diode, 2-Leads, Body 4.37x2.62mm, IPC Low Density"
  rect 2.55x1.75 smd: 1(-1.905,0) 2(1.905,0)
  silkscreen extent -2.4,-1.45 3.17,1.55, body extent -2.6,-1.42 2.59,1.42, height 2.95
SOD123F [mm] "SODFL, 2-Leads, Body 1.80x3.50mm, IPC Low Density"
  rect 1.35x1.45 smd: 1(-1.475,0) 2(1.475,0)
  silkscreen extent -0.38,-0.76 1.75,1.5, body extent -1.75,-0.95 1.75,0.95, height 1.15
SOD323F [mm] "SODFL, 2-Leads, Body 1.25x2.50mm, IPC Low Density"
  rect 1x0.65 smd: 1(-1.15,0) 2(1.15,0)
  silkscreen extent -1.6,0.58 -1.5,0.67, body extent -1.25,-0.67 1.25,0.67, height 0.8
SOIC-4 [mm] "SOIC, 4-Leads, Body 2.70x4.40mm, Pitch 1.27mm, IPC Medium Density"
  oval 1.7x0.6 smd: 1(-3.15,0.635) 2(-3.15,-0.635) 3(3.15,-0.635) 4(3.15,0.635)
  silkscreen extent -3.27,-1.5 1.9,1.61, body extent -3.5,-1.5 3.5,1.5, height 2
"SOIC-6 (8-mm Clearance)" [mm]
  oval 2.25x0.65 smd: 1(-5.3,1.27) 2(-5.3,0) 3(-5.3,-1.27) 4(5.3,-1.27) 5(5.3,0) 6(5.3,1.27)
  silkscreen extent -5.42,-2.4 3.78,2.4, body extent -5.75,-2.4 5.75,2.4, height 3.25
"SOP Advance" [mm]
  rrect50% 0.85x1.45 smd: 1(-1.905,-2.75) 2(-0.635,-2.75) 3(0.635,-2.75) 4(1.905,-2.75) 5(1.905,2.75) 6(0.635,2.75) 7(-0.635,2.75) 8(-1.905,2.75)
  rect 4.66x4.1 smd: 8(0,0.7)
  Top Layer keep-out region: 5.4,1.2
  Top Layer keep-out region: -3,4
  silkscreen extent -13,-12.7 12.6,12.7, body extent -2.5,-2.5 2.5,2.5, height 0.25
TO-220ABx2 [mm] "TO-220AB, MOSFET, DIODE, BJT"
  round 0 hole 1.905: 0(-27.432,-5.334) 0(8.128,-5.08)
  oval 1.5x3 hole 1: 1(-21.844,-2.904) 2(-19.304,-2.904) 3(-16.764,-2.904) 4(-2.54,-2.904) 5(0,-2.904) 6(2.54,-2.904)
  silkscreen extent -24.26,-4.94 5.05,-0.19, body extent -28.32,-12.81 9.27,1.16, height 25.4
TSSOP-38 [mm]
  rect 1.45x0.3 smd: 1(-2.9,4.5) 2(-2.9,4) 3(-2.9,3.5) 4(-2.9,3) 5(-2.9,2.5) 6(-2.9,2) 7(-2.9,1.5) 8(-2.9,1) 9(-2.9,0.5) 10(-2.9,0) 11(-2.9,-0.5) 12(-2.9,-1) 13(-2.9,-1.5) 14(-2.9,-2) 15(-2.9,-2.5) 16(-2.9,-3) 17(-2.9,-3.5) 18(-2.9,-4) 19(-2.9,-4.5) 20(2.9,-4.5) 21(2.9,-4) 22(2.9,-3.5) 24(2.9,-2.5) 26(2.9,-1.5) 28(2.9,-0.5) 30(2.9,0.5) 32(2.9,1.5) 34(2.9,2.5) 36(2.9,3.5) 37(2.9,4) 38(2.9,4.5)
  rect 2.7x4.75 smd: 39(0,0)
  silkscreen extent -3.04,-4.85 1.8,5.24

## Part data
C1 C17 C21: library part 713, Dielectric=Ceramic, Manufacturer_id=1, Package="CAP 0805/2012", Voltage_Rating=25V, Created_By="Nick Mah", Created_Date=10/20/2018, Drawer_id=1, idCapacitor=713, Name="Cap_4.7uf_25V_CAP 0805/2012"
C2: library part 1092, Dielectric=Ceramic, Manufacturer_id=1, Package="CAP 1206/3216", Voltage_Rating=25V, ComponentLink1Description=Datasheet, Created_By="Nick Mah", Drawer_id=1, idCapacitor=1092, Name="Cap_22uf_25V_CAP 1206/3216"
C3: library part 1086, Dielectric=Ceramic, Manufacturer_id=1, Package="CAP 0805/2012", Tolerance=2%, Voltage_Rating=250V, ComponentLink1Description=Datasheet, Created_By="Nick Mah", Drawer_id=1, idCapacitor=1086, Name="Cap_11pf_200V_CAP 0805/2012"
C4: library part 1085, Dielectric=Ceramic, Manufacturer_id=1, Package="CAP 0805/2012", Tolerance=5%, Voltage_Rating=200V, ComponentLink1Description=Datasheet, Created_By="Nick Mah", Drawer_id=1, idCapacitor=1085, Name="Cap_68pf_200V_CAP 0805/2012"
C5: library part 1087, "Null", Dielectric=Hybrid, Manufacturer_id=1, MfrPartNo=EEH-ZA1E221P, Package="EL 8.3", Supplier Part Number 1=P15437CT-ND, Tolerance=20%, Voltage_Rating=25V, ComponentLink1Description=Datasheet, ComponentLink1URL=https://industrial.panasonic.com/cdbs/www-data/pdf/RDD0000/ABA0000C1221.pdf, Created_By="Jason Zhou", Created_Date=4/10/2019, Drawer_id=1, ESR=0.027, idCapacitor=1087, Link=https://www.digikey.com/product-detail/en/panasonic-electronic-components/EEH-ZA1E221P/P15437CT-ND/3088149, Name="Cap_330uf_25V_CAP EL 8.3", Supplier 1=Digi-Key, Updated_By="Jason Zhou", Updated_Date=4/22/2019
C6 C7 C8 C9: library part 1088, Dielectric=Ceramic, Manufacturer_id=1, MfrPartNo=C3216X7R1E106K160AB, Package="CAP 1206/3216", Supplier Part Number 1=445-7705-1-ND, Tolerance=10%, Voltage_Rating=25V, ComponentLink1Description=Datasheet, ComponentLink1URL=https://product.tdk.com/info/en/catalog/datasheets/mlcc_commercial_general_en.pdf, Created_By="Jason Zhou", Created_Date=4/10/2019, Drawer_id=1, idCapacitor=1088, Link=https://www.digikey.com/product-detail/en/tdk-corporation/C3216X7R1E106K160AB/445-7705-1-ND/2733777, Name="Cap_10uf_25V_CAP 1206/3216", Supplier 1=Digi-Key
C10: library part 235, Dielectric=Ceramic, Manufacturer_id=1, Package="CAP 0603/1608", Voltage_Rating=16V, Created_By="Nick Mah", Created_Date=10/20/2018, Drawer_id=1, idCapacitor=235, Name="Cap_10uf_16V_CAP 0603/1608"
C11: library part 945, Dielectric=Ceramic, Manufacturer_id=1, Package="CAP 0603/1608", Voltage_Rating=50V, Created_By="Nick Mah", Created_Date=10/20/2018, Drawer_id=1, idCapacitor=945, Name="Cap_0.22uf_50V_CAP 0603/1608"
C12: library part 591, Dielectric=Ceramic, Manufacturer_id=1, Package="CAP 0603/1608", Voltage_Rating=25V, Created_By="Nick Mah", Created_Date=10/20/2018, Drawer_id=1, idCapacitor=591, Name="Cap_2.2uf_25V_CAP 0603/1608"
C13: library part 905, Dielectric=Ceramic, Manufacturer_id=1, Package="CAP 0603/1608", Voltage_Rating=50V, Created_By="Nick Mah", Created_Date=10/20/2018, Drawer_id=1, idCapacitor=905, Name="Cap_470pf_50V_CAP 0603/1608"
C14: library part 1091, Dielectric=Ceramic, Manufacturer_id=1, Package="CAP 1210/3225", Voltage_Rating=630V, ComponentLink1Description=Datasheet, Created_By="Nick Mah", Drawer_id=1, idCapacitor=1091, Name="Cap_0.047uf_630V_CAP 1210/3225"
C15: library part 585, Dielectric=Ceramic, Manufacturer_id=1, Package="CAP 0603/1608", Voltage_Rating=25V, Created_By="Nick Mah", Created_Date=10/20/2018, Drawer_id=1, idCapacitor=585, Name="Cap_0.22uf_25V_CAP 0603/1608"
C16: library part 717, Dielectric=Ceramic, Manufacturer_id=1, Package="CAP 0805/2012", Voltage_Rating=25V, Created_By="Nick Mah", Created_Date=10/20/2018, Drawer_id=1, idCapacitor=717, Name="Cap_22uf_25V_CAP 0805/2012"
C18: library part 587, Dielectric=Ceramic, Manufacturer_id=1, Package="CAP 0603/1608", Voltage_Rating=25V, Created_By="Nick Mah", Created_Date=10/20/2018, Drawer_id=1, idCapacitor=587, Name="Cap_0.47uf_25V_CAP 0603/1608"
C19: library part 583, Dielectric=Ceramic, Manufacturer_id=1, Package="CAP 0603/1608", Voltage_Rating=25V, Created_By="Nick Mah", Created_Date=10/20/2018, Drawer_id=1, idCapacitor=583, Name="Cap_0.10uf_25V_CAP 0603/1608"
C20: library part 525, Dielectric=Ceramic, Manufacturer_id=1, Package="CAP 0603/1608", Voltage_Rating=25V, Created_By="Nick Mah", Created_Date=10/20/2018, Drawer_id=1, idCapacitor=525, Name="Cap_68pf_25V_CAP 0603/1608"
C22: library part 219, Dielectric=Ceramic, Manufacturer_id=1, Package="CAP 0603/1608", Voltage_Rating=16V, Created_By="Nick Mah", Created_Date=10/20/2018, Drawer_id=1, idCapacitor=219, Name="Cap_0.022uf_16V_CAP 0603/1608"
C23: library part 220, Dielectric=Ceramic, Manufacturer_id=1, Package="CAP 0603/1608", Voltage_Rating=16V, Created_By="Nick Mah", Created_Date=10/20/2018, Drawer_id=1, idCapacitor=220, Name="Cap_0.033uf_16V_CAP 0603/1608"
C24: library part 589, Dielectric=Ceramic, Manufacturer_id=1, Package="CAP 0603/1608", Voltage_Rating=25V, Created_By="Nick Mah", Created_Date=10/20/2018, Drawer_id=1, idCapacitor=589, Name="Cap_1.0uf_25V_CAP 0603/1608"
C25: library part 537, Dielectric=Ceramic, Manufacturer_id=1, Package="CAP 0603/1608", Voltage_Rating=25V, Created_By="Nick Mah", Created_Date=10/20/2018, Drawer_id=1, idCapacitor=537, Name="Cap_220pf_25V_CAP 0603/1608"
C26: library part 1093, "10µF 500V Aluminum Electrolytic Capacitors Radial, Can  8000 Hrs @ 105°C", Dielectric=Electrolytic, Manufacturer_id=1, MfrPartNo=EKXJ501ELL100MJ30S, Package="TH D10_31.5", Supplier Part Number 1=565-4930-ND, Voltage_Rating=500V, ComponentLink1Description=Datasheet, ComponentLink1URL=http://www.chemi-con.com/upload/files/7/6/113326760852d6c4ba03a36.pdf, Created_By="Nick Mah", Drawer_id=1, idCapacitor=1093, Link=https://www.digikey.com/product-detail/en/united-chemi-con/EKXJ501ELL100MJ30S/565-4930-ND/7809906, Name="Cap_10uf_500V_CAP D10_31.5", Supplier 1=Digi-Key
C27 C28 C29 C30: library part 1089, "Null", Dielectric=Ceramic, Manufacturer_id=1, MfrPartNo=C4532X7T2J304K250KA, Package="CAP 1812/4532", Supplier Part Number 1=445-13458-1-ND, Tolerance=10%, Voltage_Rating=630V, ComponentLink1Description=Datasheet, ComponentLink1URL=https://product.tdk.com/info/en/catalog/datasheets/mlcc_commercial_midvoltage_en.pdf, Created_By="Jason Zhou", Created_Date=4/10/2019, Drawer_id=1, idCapacitor=1089, Link=https://www.digikey.com/product-detail/en/tdk-corporation/C4532X7T2J304K250KA/445-13458-1-ND/3955124, Name="Cap_0.3uf_630V_CAP 1812/4532", Supplier 1=Digi-Key
D1 D2: library part 16, "Diode Schottky 100V 250mA (DC) Surface Mount SOD-323F", Manufacturer_id=1, MfrPartNo=BAT46WJ,115, Package=SOD-323F, Power=100Vr, Supplier1PartNo=1727-4817-1-ND, ComponentLink1Description=Datasheet, ComponentLink1URL=https://assets.nexperia.com/documents/data-sheet/BAT46WJ.pdf, Created_By="Nick Mah", Drawer_id=1, Ic=250mA, idDiode=16, Link=https://www.digikey.com/product-detail/en/nexperia-usa-inc/BAT46WJ115/1727-4817-1-ND/2531304, Name=BAT46WJ, Num_Circuits=1, Supplier1=Digi-Key, Type=Schottky
D3: library part 17, "Diode Standard 1000V 1A Surface Mount SMA", Manufacturer_id=1, MfrPartNo=RS1MTR, Package=SMA, Power=1000Vr, Supplier1PartNo=1655-1501-1-ND, ComponentLink1Description=Datasheet, ComponentLink1URL=http://www.smc-diodes.com/propdf/RS1A-RS1M%20N0988%20REV.B.pdf, Created_By=Nick, Drawer_id=1, Ic=1A, idDiode=17, Link=https://www.digikey.com/product-detail/en/smc-diode-solutions/RS1MTR/1655-1501-1-ND/6022946, Name=RS1MTR, Num_Circuits=1, Supplier1=Digi-Key, Type=Standard
D4 D6: library part 4, "100V Reverse DC Voltage", Manufacturer_id=1, MfrPartNo=1N4148W-7-F, Package=SOD123, Drawer_id=1, Ic="300 mA", idDiode=4, Link=https://www.digikey.com/product-detail/en/diodes-incorporated/1N4148W-7-F/1N4148W-FDICT-ND/815280, Name=1N4148W-7-F, Num_Circuits=1, Type=Standard
D5: library part 1, Package=0805, Drawer_id=1, idLED=1, Manufacturer_id=1, Name=LED_0805_RED, Vf=0.7V
D7: library part 18, "Diode Standard 600V 5A Surface Mount SMB", Manufacturer_id=1, Package=SMB, Supplier1PartNo=1655-1530-1-ND, ComponentLink1Description=Datasheet, ComponentLink1URL=http://www.smc-diodes.com/propdf/SD560B%20N1412%20REV.D.pdf, Created_By="Jason Zhou", Created_Date=4/26/2019, Drawer_id=1, Ic=5A, idDiode=18, Link=https://www.digikey.com/product-detail/en/smc-diode-solutions/SD560BTR/1655-1530-1-ND/6022975, MfrPartNo=SD560BTR, Name=SD560BTR, Num_Circuits=1, Supplier1=Digi-Key, Type=Standard
F1: library part 10, Manufacturer_id=1, MfrPartNo=04853.15DR, Created_By="Jason Zhou", Created_Date=4/11/2019, Drawer_id=1, I_hold=3.15A, I_max=6.3A, idFuse=10, Link=https://www.digikey.com/product-detail/en/littelfuse-inc/04853.15DR/F5925CT-ND/3911051, Name=04853,15DR, V_max=600VDC
L1: library part 6, "4.7uH Wirewound Inductor 6A 19.5 mOhm Nonstandard", Current_Rating=6A, DC_Resistance=0.0195, Manufacturer_id=1, MfrPartNo=744311470, Package=Nonstandard, Supplier1PartNo=732-1153-1-ND, Tolerance=20%, ComponentLink1Description=Datasheet, ComponentLink1URL=https://katalog.we-online.de/pbs/datasheet/744311470.pdf, Created_By="Jason Zhou", Created_Date=4/11/2019, Drawer_id=1, idInductor=6, Link=https://www.digikey.com/product-detail/en/wurth-electronics-inc/744311470/732-1153-1-ND/1639214, Name=744311470, SRF=33MHz, Supplier1=Digi-Key
L2: library part 8, "1.5µH Shielded Molded Inductor 42A 1.88mOhm Max Nonstandard", Current_Rating=42A, DC_Resistance=1.88mOhm, Manufacturer_id=1, MfrPartNo=IHLP-6767GZ-01, Package=Nonstandard, Supplier1PartNo=541-1251-1-ND, Tolerance=20%, ComponentLink1Description=Datasheet, ComponentLink1URL=http://www.vishay.com/docs/34000/ihlp-6767gz-01.pdf, Created_By="Jason Zhou", Created_Date=4/22/2019, Drawer_id=1, idInductor=8, Link=https://www.digikey.com/product-detail/en/vishay-dale/IHLP6767GZER1R5M01/541-1251-1-ND/2025141, Name=IHLP-6767GZ-01, Supplier1=Digi-Key
L2: library part 7, "10µH Shielded Wirewound Inductor 500mA 850mOhm Nonstandard", Current_Rating=0.5A, DC_Resistance=850mOhm, Manufacturer_id=1, MfrPartNo=74404020100, Package=Nonstandard, Supplier1PartNo=732-10745-1-ND, Tolerance=20%, ComponentLink1Description=Datasheet, ComponentLink1URL=https://katalog.we-online.de/pbs/datasheet/74404020100.pdf, Created_By="Jason Zhou", Created_Date=4/18/2019, Drawer_id=1, idInductor=7, Link=https://www.digikey.com/product-detail/en/wurth-electronics-inc/74404020100/732-10745-1-ND/6598179, Name=74404020100, SRF=39MHz, Supplier1=Digi-Key
M1: library part 14, "COOLMOS P7 800V SOT-223", Manufacturer_id=1, MfrPartNo=IPN80R750P7ATMA1, Package=PG-SOT223, Power(Max)=7.2W, Supplier1PartNo=IPN80R750P7ATMA1TR-ND, ComponentLink1Description=Datasheet, ComponentLink1URL=https://www.infineon.com/dgdl/Infineon-IPN80R750P7-DS-v02_00-EN.pdf?fileId=5546d4625f2e26bc015f528bca636b84, Created_By="Nick Mah", Drawer_id=1, Id=7A, idFETs=14, Link=https://www.digikey.com/product-detail/en/infineon-technologies/IPN80R750P7ATMA1/IPN80R750P7ATMA1TR-ND/8130852, Name=IPN80R750P7, Num_Circuits=1, Rds_On=750mOhm, Supplier1=Digi-Key, Vdss=800V, Vgs(Max)=20V, Vgs(typ)=10V
M2: library part 18, "N-Channel 30V 150A (Tc) 960mW (Ta), 170W (Tc) Surface Mount 8-SOP Advance (5x5)", Manufacturer_id=1, MfrPartNo=TPHR6503PL,L1Q, Package="SOP Advance", Power(Max)=170W, Supplier1PartNo=TPHR6503PLL1QCT-ND, ComponentLink1Description=Datasheet, ComponentLink1URL=https://toshiba.semicon-storage.com/info/docget.jsp?did=35760&prodName=TPHR6503PL, Created_By="Nick Mah", Drawer_id=1, Id=150A, idFETs=18, Link=https://www.digikey.com/product-detail/en/toshiba-semiconductor-and-storage/TPHR6503PLL1Q/TPHR6503PLL1QCT-ND/6099957, Name=TPHR6503PL, Num_Circuits=1, Rds_On=65mOhm, Supplier1=Digi-Key, Vdss=30V, Vgs(Max)=20V, Vgs(typ)=10V
M3: library part 22, "N-Channel 150V 83A (Tc) 294W (Tc) Through Hole TO-220-3", Manufacturer_id=1, MfrPartNo=FDP083N15A-F102, Package=TO-220ABx2, Power(Max)=294W, Supplier1PartNo=FDP083N15A-F102-ND, ComponentLink1Description=Datasheet, ComponentLink1URL=https://www.onsemi.com/pub/Collateral/FDP083N15A-D.pdf, Drawer_id=1, Id=83A, idFETs=22, Link=https://www.digikey.com/product-detail/en/on-semiconductor/FDP083N15A-F102/FDP083N15A-F102-ND/3137187, Name=FDP083N15Ax2, Num_Circuits=1, Rds_On=8.3mOhm, Supplier1=Digi-Key, Vdss=150V, Vgs(Max)=20V, Vgs(typ)=10V
M5: library part 16, "N-Channel 600V 20.2A (Tc) 151W (Tc) Through Hole PG-TO220-3", Manufacturer_id=1, MfrPartNo=IPP60R190P6XKSA1, Package=TO-220, Power(Max)=151W, Supplier1PartNo=IPP60R190P6XKSA1-ND, ComponentLink1Description=Datasheet, ComponentLink1URL=https://www.infineon.com/dgdl/DS_IPP60R190P6_2_0_Approved.pdf?folderId=db3a3043156fd5730115c736bcc70ff2&fileId=db3a30433f2e70c5013f37a818ba23e7, Created_By="Nick Mah", Drawer_id=1, Id=20.2, idFETs=16, Link=https://www.digikey.com/products/en?keywords=IPP60R190P6, Name=IPP60R190P6, Num_Circuits=1, Rds_On=190mOhm, Supplier1=Digi-Key, Vdss=600V, Vgs(Max)=20V, Vgs(typ)=10V
R1: library part 2711, "2.5 mOhms ±1% 0.25W, 1/4W Chip Resistor 0603 (1608 Metric) Automotive AEC-Q200, Current Sense, Moisture Resistant Metal Foil", Manufacturer_id=1, MfrPartNo=CSRF0603FT2L50, Package=0603, Power=1/4W, Supplier Part Number 1=CSRF0603FT2L50CT-ND, Tolerance=1%, ComponentLink1Description=Datasheet, ComponentLink1URL=https://www.seielect.com/catalog/sei-csrf.pdf, Created_By="Nick Mah", Drawer_id=1, idResistor=2711, Link=https://www.digikey.com/product-detail/en/stackpole-electronics-inc/CSRF0603FT2L50/CSRF0603FT2L50CT-ND/5798089, Name=CSRF0603FT2L50, Supplier 1=Digi-Key
R2: library part 2712, Manufacturer_id=1, Package=1206, Power=1W, Supplier Part Number 1=Digi-Key, Tolerance=5%, ComponentLink1Description=Datasheet, Created_By="Nick Mah", Drawer_id=1, idResistor=2712, Name=Res_560_1206_1W_5%, Supplier 1=Digi-Key
R3: library part 2713, "1 mOhms ±1% 1.5W Chip Resistor 2010 (5025 Metric) Current Sense, Moisture Resistant Metal Foil", Manufacturer_id=1, MfrPartNo=TLR2H15DR001FTDG, Package=2010, Power=1.5W, Supplier Part Number 1=A138745CT-ND, Tolerance=1%, ComponentLink1Description=Datasheet, ComponentLink1URL=https://www.te.com/commerce/DocumentDelivery/DDEController?Action=srchrtrv&DocNm=1773449-3&DocType=DS&DocLang=English, Created_By="Nick Mah", Drawer_id=1, idResistor=2713, Link=https://www.digikey.com/product-detail/en/te-connectivity-passive-product/TLR2H15DR001FTDG/A138745CT-ND/9372146, Name=Res_0.001_2010_1.5W_1%, Supplier 1=Digi-Key
R4: library part 327, Manufacturer_id=1, Package=0603, Power=1/10W, Tolerance=1%, ComponentLink1Description=Datasheet, Created_By="Nick Mah", Created_Date=2018-10-20, Drawer_id=1, idResistor=327, Name=Res_39k_0603_1/10W_1%, Supplier 1=Digi-Key
R5: library part 2710, "8 mOhms ±1% 1W Chip Resistor 1206 (3216 Metric) Automotive AEC-Q200, Current Sense Thick Film", Manufacturer_id=1, MfrPartNo=PMR18EZPFU8L00, Package=1206, Power=1W, Supplier Part Number 1=RHM.008ALCT-ND, Tolerance=1%, ComponentLink1Description=Datasheet, ComponentLink1URL=https://www.rohm.com/datasheet/PMR18EZPFV/pmr-e, Created_By="Nick Mah", Drawer_id=1, idResistor=2710, Link=https://www.digikey.com/product-detail/en/rohm-semiconductor/PMR18EZPFU8L00/RHM.008ALCT-ND/2094241, Name=PMR18EZPFU8L00, Supplier 1=Digi-Key
R6: library part 2714, "1.3 Ohms ±1% 0.25W, 1/4W Chip Resistor 1206 (3216 Metric)  Thick Film", Manufacturer_id=1, MfrPartNo=MCR18ERTFL1R30, Package=1206, Power=1/4W, Supplier Part Number 1=RHM1.30CJCT-ND, Tolerance=1%, ComponentLink1Description=Datasheet, ComponentLink1URL=https://media.digikey.com/pdf/Compliance/Rohm/MCR18ERT_Material.pdf, Created_By="Nick Mah", Drawer_id=1, idResistor=2714, Link=https://www.digikey.com/product-detail/en/rohm-semiconductor/MCR18ERTFL1R30/RHM1.30CJCT-ND/2796563, Name=Res_1.3_1206_1/4W_1%, Supplier 1=Digi-Key
R7: library part 665, Manufacturer_id=1, Package=0805, Power=1/4W, Tolerance=1%, ComponentLink1Description=Datasheet, Created_By="Nick Mah", Created_Date=2018-10-20, Drawer_id=1, idResistor=665, Name=Res_4.7_0805_1/4W_1%, Supplier 1=Digi-Key
R8 R11 R34 R38: library part 313, Manufacturer_id=1, Package=0603, Power=1/10W, Tolerance=1%, ComponentLink1Description=Datasheet, Created_By="Nick Mah", Created_Date=2018-10-20, Drawer_id=1, idResistor=313, Name=Res_10k_0603_1/10W_1%, Supplier 1=Digi-Key
R9: library part 1353, Manufacturer_id=1, Package=0603, Power=1/10W, Tolerance=5%, ComponentLink1Description=Datasheet, Created_By="Nick Mah", Created_Date=2018-10-20, Drawer_id=1, idResistor=1353, Name=Res_220_0603_1/10W_5%, Supplier 1=Digi-Key
R10: library part 1349, Manufacturer_id=1, Package=0603, Power=1/10W, Tolerance=5%, ComponentLink1Description=Datasheet, Created_By="Nick Mah", Created_Date=2018-10-20, Drawer_id=1, idResistor=1349, Name=Res_150_0603_1/10W_5%, Supplier 1=Digi-Key
R12: library part 2720, Manufacturer_id=1, Package=0603, Power=1/10W, Supplier Part Number 1=Digi-Key, Tolerance=1%, ComponentLink1Description=Datasheet, Created_By="Nick Mah", Drawer_id=1, idResistor=2720, Name=Res_806_0603_1/10W_1%, Supplier 1=Digi-Key
R13: library part 2722, Manufacturer_id=1, Package=0603, Power=1/10W, Supplier Part Number 1=Digi-Key, Tolerance=1%, ComponentLink1Description=Datasheet, Created_By="Nick Mah", Drawer_id=1, idResistor=2722, Name=Res_2.8k_0603_1/10W_1%, Supplier 1=Digi-Key
R14: library part 2723, Manufacturer_id=1, Package=0603, Power=1/10W, Supplier Part Number 1=Digi-Key, Tolerance=1%, ComponentLink1Description=Datasheet, Created_By="Nick Mah", Drawer_id=1, idResistor=2723, Name=Res_499_1/10W_1%, Supplier 1=Digi-Key
R15: library part 2719, Manufacturer_id=1, Package=1206, Power=1/4W, Supplier Part Number 1=Digi-Key, Tolerance=1%, ComponentLink1Description=Datasheet, Created_By="Nick Mah", Drawer_id=1, idResistor=2719, Name=Res_715k_1206_1/4W_1, Supplier 1=Digi-Key
R16: library part 2497, Manufacturer_id=1, Package=0805, Power=1/4W, Tolerance=10%, ComponentLink1Description=Datasheet, Created_By="Nick Mah", Created_Date=2018-10-20, Drawer_id=1, idResistor=2497, Name=Res_10_0805_1/4W_10%, Supplier 1=Digi-Key
R17: library part 361, Manufacturer_id=1, Package=0603, Power=1/10W, Tolerance=1%, ComponentLink1Description=Datasheet, Created_By="Nick Mah", Created_Date=2018-10-20, Drawer_id=1, idResistor=361, Name=Res_1.0M_0603_1/10W_1%, Supplier 1=Digi-Key
R18 R19: library part 320, Manufacturer_id=1, Package=0603, Power=1/10W, Tolerance=1%, ComponentLink1Description=Datasheet, Created_By="Nick Mah", Created_Date=2018-10-20, Drawer_id=1, idResistor=320, Name=Res_20k_0603_1/10W_1%, Supplier 1=Digi-Key
R20 R42: library part 293, Manufacturer_id=1, Package=0603, Power=1/10W, Tolerance=1%, ComponentLink1Description=Datasheet, Created_By="Nick Mah", Created_Date=2018-10-20, Drawer_id=1, idResistor=293, Name=Res_1.5k_0603_1/10W_1%, Supplier 1=Digi-Key
R21: library part 2718, Manufacturer_id=1, Package=0603, Power=1/10W, Supplier Part Number 1=Digi-Key, Tolerance=1%, ComponentLink1Description=Datasheet, Created_By="Nick Mah", Drawer_id=1, idResistor=2718, Name=Res_36.5k_0603_1/10W_1%, Supplier 1=Digi-Key
R22 R23: library part 337, Manufacturer_id=1, Package=0603, Power=1/10W, Tolerance=1%, ComponentLink1Description=Datasheet, Created_By="Nick Mah", Created_Date=2018-10-20, Drawer_id=1, idResistor=337, Name=Res_100k_0603_1/10W_1%, Supplier 1=Digi-Key
R24: library part 300, Manufacturer_id=1, Package=0603, Power=1/10W, Tolerance=1%, ComponentLink1Description=Datasheet, Created_By="Nick Mah", Created_Date=2018-10-20, Drawer_id=1, idResistor=300, Name=Res_3.0k_0603_1/10W_1%, Supplier 1=Digi-Key
R25: library part 1801, Manufacturer_id=1, Package=0805, Power=1/4W, Tolerance=5%, ComponentLink1Description=Datasheet, Created_By="Nick Mah", Created_Date=2018-10-20, Drawer_id=1, idResistor=1801, Name=Res_1.0k_0805_1/4W_5%, Supplier 1=Digi-Key
R26: library part 2716, Manufacturer_id=1, Package=0603, Power=1/10W, Supplier Part Number 1=Digi-Key, Tolerance=1%, ComponentLink1Description=Datasheet, Created_By="Nick Mah", Drawer_id=1, idResistor=2716, Name=Res_24.9k_0603_1/10W_1%, Supplier 1=Digi-Key
R27: library part 333, Manufacturer_id=1, Package=0603, Power=1/10W, Tolerance=1%, ComponentLink1Description=Datasheet, Created_By="Nick Mah", Created_Date=2018-10-20, Drawer_id=1, idResistor=333, Name=Res_68k_0603_1/10W_1%, Supplier 1=Digi-Key
R28: library part 330, Manufacturer_id=1, Package=0603, Power=1/10W, Tolerance=1%, ComponentLink1Description=Datasheet, Created_By="Nick Mah", Created_Date=2018-10-20, Drawer_id=1, idResistor=330, Name=Res_51k_0603_1/10W_1%, Supplier 1=Digi-Key
R29: library part 2717, Manufacturer_id=1, Package=0603, Power=1/10W, Supplier Part Number 1=Digi-Key, Tolerance=1%, ComponentLink1Description=Datasheet, Created_By="Nick Mah", Drawer_id=1, idResistor=2717, Name=Res_76.8k_0603_1/10W_1%, Supplier 1=Digi-Key
R30: library part 317, Manufacturer_id=1, Package=0603, Power=1/10W, Tolerance=1%, ComponentLink1Description=Datasheet, Created_By="Nick Mah", Created_Date=2018-10-20, Drawer_id=1, idResistor=317, Name=Res_15k_0603_1/10W_1%, Supplier 1=Digi-Key
R31: library part 310, Manufacturer_id=1, Package=0603, Power=1/10W, Tolerance=1%, ComponentLink1Description=Datasheet, Created_By="Nick Mah", Created_Date=2018-10-20, Drawer_id=1, idResistor=310, Name=Res_7.5k_0603_1/10W_1%, Supplier 1=Digi-Key
R32 R33 R37: library part 278, Manufacturer_id=1, Package=0603, Power=1/10W, Tolerance=1%, ComponentLink1Description=Datasheet, Created_By="Nick Mah", Created_Date=2018-10-20, Drawer_id=1, idResistor=278, Name=Res_360_0603_1/10W_1%, Supplier 1=Digi-Key
R35: library part 287, Manufacturer_id=1, Package=0603, Power=1/10W, Tolerance=1%, ComponentLink1Description=Datasheet, Created_By="Nick Mah", Created_Date=2018-10-20, Drawer_id=1, idResistor=287, Name=Res_820_0603_1/10W_1%, Supplier 1=Digi-Key
R36: library part 2715, "470 Ohm 1 Gang Linear Through Hole Potentiometer None 1 Turn Carbon 0.1W, 1/10W PC Pins", Manufacturer_id=1, MfrPartNo=PT6WV-471A2020, Package=TH, Power=1/10W, Supplier Part Number 1=1993-1025-ND, Tolerance=20%, ComponentLink1Description=Datasheet, ComponentLink1URL=https://www.mouser.com/datasheet/2/18/11-PT6v03-1499160.pdf, Created_By="Nick Mah", Drawer_id=1, idResistor=2715, Link=https://www.digikey.com/product-detail/en/amphenol-piher-sensing-systems/PT6WV-471A2020/1993-1025-ND/9555863, Name=PT6WV-471A2020, Supplier 1=Digi-Key
R39: library part 329, Manufacturer_id=1, Package=0603, Power=1/10W, Tolerance=1%, ComponentLink1Description=Datasheet, Created_By="Nick Mah", Created_Date=2018-10-20, Drawer_id=1, idResistor=329, Name=Res_47k_0603_1/10W_1%, Supplier 1=Digi-Key
R40 R43: library part 283, Manufacturer_id=1, Package=0603, Power=1/10W, Tolerance=1%, ComponentLink1Description=Datasheet, Created_By="Nick Mah", Created_Date=2018-10-20, Drawer_id=1, idResistor=283, Name=Res_560_0603_1/10W_1%, Supplier 1=Digi-Key
R41: library part 690, Manufacturer_id=1, Package=0805, Power=1/4W, Tolerance=1%, ComponentLink1Description=Datasheet, Created_By="Nick Mah", Created_Date=2018-10-20, Drawer_id=1, idResistor=690, Name=Res_51_0805_1/4W_1%, Supplier 1=Digi-Key
T1: library part 1, "Auxilliary Transformer for DC-DC Senior Project", Current_Rating=100mA, MfrPartNo=750817020, Package="Through Hole", Tolerance=10%, Voltage_Primary=200-450VDC, Voltage_Secondary=10VDC, ComponentLink1Description=Datasheet, ComponentLink1URL=https://katalog.we-online.com/ctm/datasheet/750817020.pdf, Drawer_id=1, idTransformer=1, Link=https://katalog.we-online.com/en/ctm/MID-OLLT/S/750817020?m=n&sq=750817020&sp=https%3A%2F%2Fwww.we-online.com%2Fweb%2Fen%2Fwuerth_elektronik%2Fsearchpage.php%3Fsearch%3D750817020#vs_ct:1, Manufacturer_id=1, Name="500W DC-DC Aux Trfrmr"
T2: library part 3, Manufacturer_id=1, Voltage_Primary=200-450VDC, Voltage_Secondary=45-95VDC, Drawer_id=1, idTransformer=3, Name="500W DC-DC Main Trfrmr"